# Altium PCB BRIDGE_RECTIFIER.PcbDoc
Units mm, origin at the board's own origin, x right, y up, seen from the top; angles counter-clockwise.
Board outline 152.4 x 101.6 mm, 2 copper layers (Top Layer, Bottom Layer); 11 components, 6 nets, 23 pads, 0 vias.
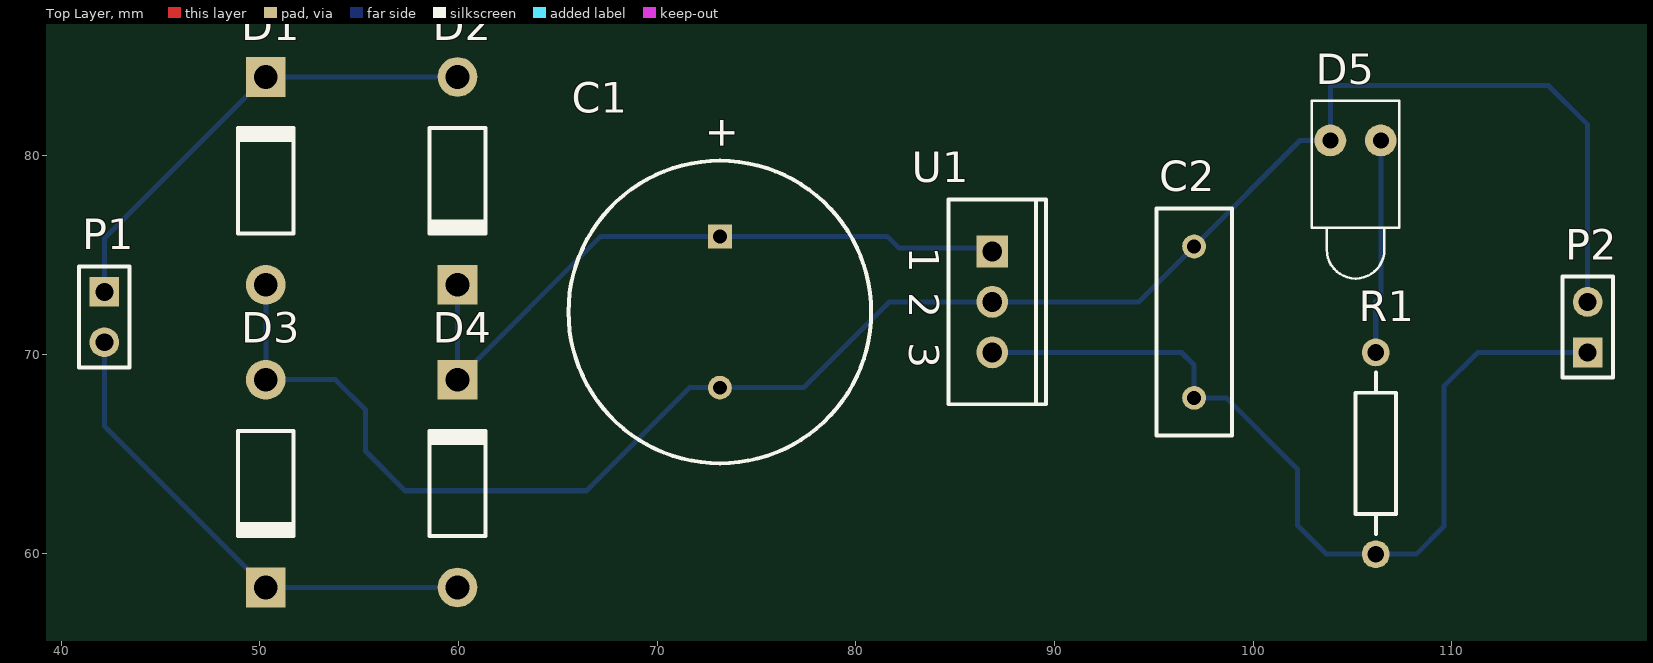
[diagram p0: Top Layer view]
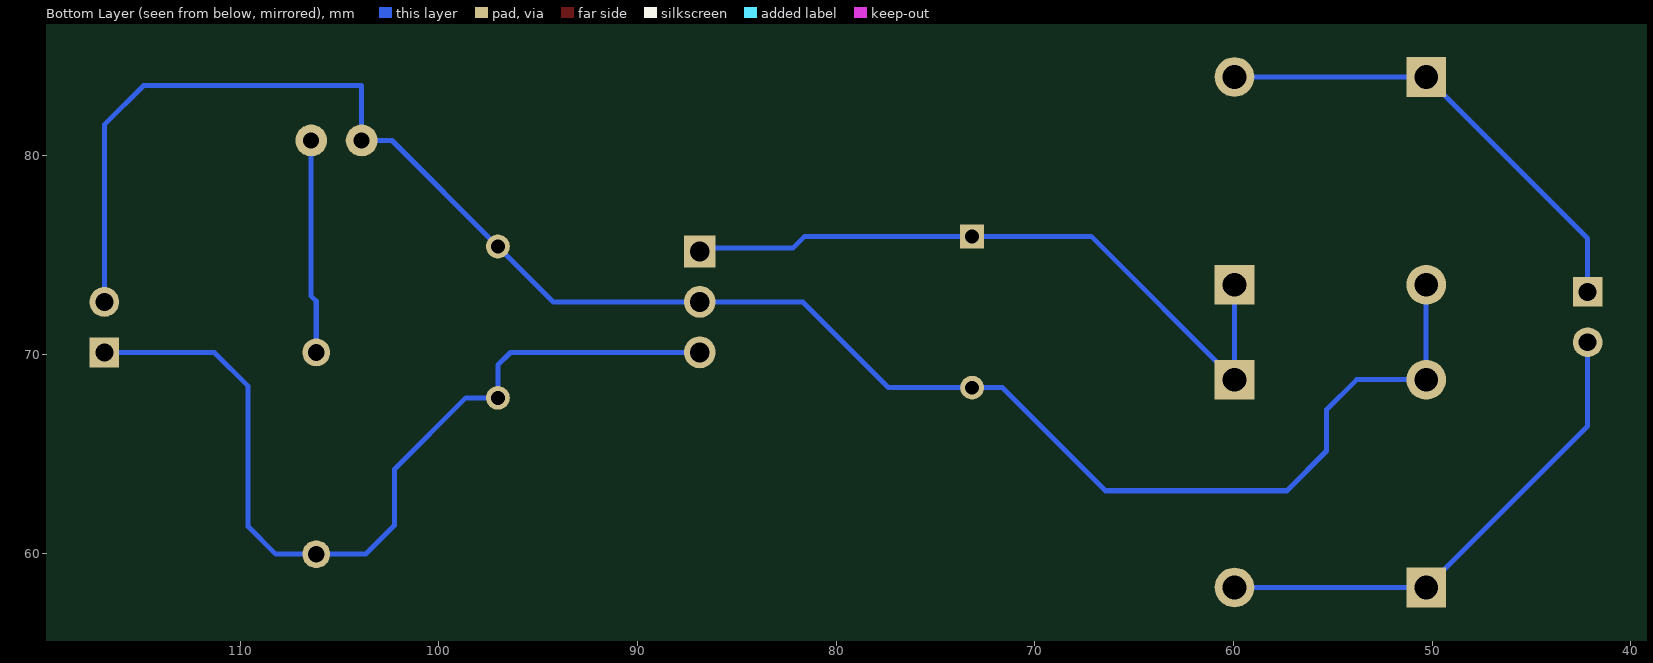
[diagram p1: Bottom Layer view, seen from below]

## Layer stack, top to bottom
Top Layer: signal copper 0.0356
Dielectric: dielectric 0.32, FR-4, Dk 4.8
Bottom Layer: signal copper 0.0356

## Board outline
25.4,25.4 177.8,25.4 177.8,127 25.4,127

## Design rules (kind name [scope] priority, off if disabled: settings)
Clearance [All] p1: gap=0.254
PolygonConnect [All] p1: connectstyle=Relief reliefconductorwidth=0.254 reliefentries=4 polygonreliefangle="90 Angle"
RoutingVias [All] p1: holewidth=0.711 width=1.27 viastyle="Through Hole" minholewidth=0.711 minwidth=1.27 maxholewidth=0.711 maxwidth=1.27
SilkscreenOverComponentPads [All] p1: minsilkscreentomaskgap=0.254
SolderMaskExpansion [All] p1: expansion=0.102
Width [All] p1: maxlimit=0.254 minlimit=0.254 preferedwidth=0.254
27 further rules are at their usual default settings.

## Components (designator, comment, footprint, x,y, rotation, side; value= is the part's Value field where it differs from the comment)
C1 "Cap Pol1" RB7.6-15 73.152,72.136 r90 top
C2 "Cap" RAD-0.3 97.028,71.628 r270 top
D1 "Diode 1N4007" DIO10.46-5.3x2.8 50.292,78.74 r90 top
D2 "Diode 1N4007" DIO10.46-5.3x2.8 59.944,78.74 r270 top
D3 "Diode 1N4007" DIO10.46-5.3x2.8 50.292,63.5 r270 top
D4 "Diode 1N4007" DIO10.46-5.3x2.8 59.944,63.5 r90 top
D5 "LED1" LED-1 105.156,80.772 r270 top
P1 "Header 2" HDR1X2 42.164,73.152 r270 top
P2 "Header 2" HDR1X2 116.84,70.104 r90 top
R1 "Res2" AXIAL-0.4 106.172,65.024 r270 top
U1 "MC7805ACT" 221A-04 86.868,72.644 r270 top

## Footprints (in the part's own frame and the unit in brackets; to place one, negate y for a bottom-side part, rotate by r counter-clockwise, add the part's x,y. Pads: shape width x height; smd on the part's side, far side on the other; paste and mask are expansions set on the pad)
221A-04 [mm] "TO, Thru-Hole, Vertical, Heatsink Mounted; 3 In-Line Leads; Pitch 2.54 mm"
  rect 1.6x1.6 hole 1: 1(-2.54,0)
  round 1.6 hole 1: 2(0,0) 3(2.54,0)
  silkscreen extent -5.15,-2.2 5.15,2.7
AXIAL-0.4 [mm] "Axial Device, Thru-Hole; 2 Leads; 0.4 in Pin Spacing"
  round 1.4 hole 0.85: 1(-5.08,0) 2(5.08,0)
  silkscreen extent -4.06,-1.02 4.06,1.02
DIO10.46-5.3x2.8 [mm] "Diode, Axial; Body 5.2 x 2.7 mm (LxDia. max), Lead Dia. 0.86 mm (max)"
  round 2 hole 1.2: 1(-5.23,0)
  rect 2x2 hole 1.2: 2(5.23,0)
  silkscreen extent -2.65,-1.41 2.75,1.4
HDR1X2 [mm] "Connector; Header; 2 Position"
  rect 1.5x1.5 hole 0.9: 1(0,0)
  round 1.5 hole 0.9: 2(2.54,0)
  silkscreen extent -1.27,-1.27 3.81,1.27
LED-1 [mm] "Typical RED GaAs LED; 2 Leads"
  round 1.6 hole 0.8: 1(0,1.27) 2(0,-1.27)
  silkscreen extent -2,-2.2 6.95,2.2
RAD-0.3 [mm] "Radial Cap, Thru-Hole; 2 Leads; 0.3 in Pin Spacing"
  round 1.2 hole 0.7: 1(-3.81,0) 2(3.81,0)
  silkscreen extent -5.71,-1.91 5.71,1.91
RB7.6-15 [mm] "Polarized Capacitor (Radial); 2 Leads"
  rect 1.2x1.2 hole 0.7: 1(3.81,0)
  round 1.2 hole 0.7: 2(-3.81,0)
  silkscreen extent -7.62,-7.62 7.62,7.62

## Part data
C1: "Polarized Capacitor (Radial)"
C2: "Capacitor"
D1 D2 D3 D4: "1 Amp General Purpose Rectifier"
D5: "Typical RED GaAs LED"
P1 P2: "Header, 2-Pin"
R1: "Resistor"
U1: "3-Terminal Positive Fixed Voltage Regulator"

## Nets (pads, with @x,y where several pads share a name; then routed paths per layer and width w, separated by ;. In a path a pad name is that pad's centre, name@x,y a point inside that pad or via, vN(x,y) a via of type N, cw(c..) or ccw(c..) an arc to the next point about the centre after c; other vN are vias at no path point)
+5V: C2.2 P2.1 R1.2 U1.3 | length 45.1
  Bottom Layer w0.254: U1.3 96.396,70.104 97.028,69.472 C2.2 98.641,67.818 102.233,64.226 102.233,61.401 103.69,59.944 R1.2 108.205,59.944 109.601,61.34 109.601,68.4 111.305,70.104 P2.1
GND: C1.2 C2.1 D1.1 D3.1 D5.2 P2.2 U1.2 | length 94.7
  Bottom Layer w0.254: D1.1 D3.1 53.793,68.73 55.307,67.216 55.307,65.137 57.305,63.139 66.441,63.139 71.628,68.326 77.358,68.326 81.676,72.644 U1.2 94.234,72.644 C2.1 102.362,80.772 D5.2 103.886,83.534 114.873,83.534 116.84,81.567 P2.2
NetC1_1: C1.1 D2.2 D4.2 U1.1 | length 35
  Bottom Layer w0.254: D2.2 D4.2 67.16,75.946 81.583,75.946 82.161,75.368 86.684,75.368 U1.1
NetD1_2: D1.2 D2.1 P1.1 | length 23.8
  Bottom Layer w0.254: P1.1 42.164,75.842 D1.2 D2.1
NetD3_2: D3.2 D4.1 P1.2 | length 25.4
  Bottom Layer w0.254: P1.2 42.164,66.398 D3.2 D4.1
NetD5_1: D5.1 R1.1 | length 10.8
  Bottom Layer w0.254: R1.1 106.172,72.678 106.426,72.932 D5.1

## Text inside footprints (layer, text, board x,y; h text height)
C1: Top Overlay "+" at 73.889,80.268 h1.5 r90
U1: Top Overlay "1" at 82.693,75.434 h1.5 r270; Top Overlay "2" at 82.693,73.144 h1.5 r270; Top Overlay "3" at 82.693,70.604 h1.5 r270